# Altium PCB 1.PcbDoc
Units mm, origin at the board's own origin, x right, y up, seen from the top; angles counter-clockwise.
Board outline 152.4 x 101.6 mm, 2 copper layers (Top Layer, Bottom Layer); 10 components, 24 nets, 72 pads, 10 vias.
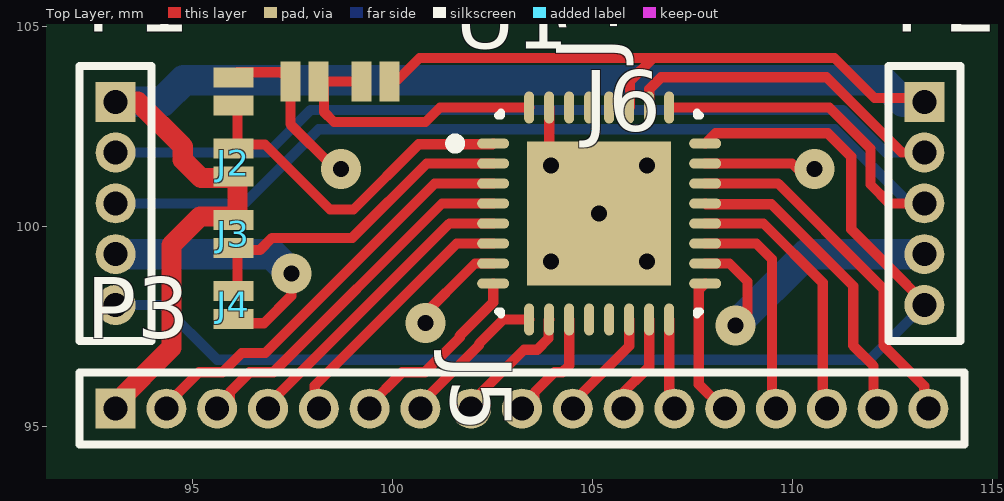
[diagram p0: Top Layer view]
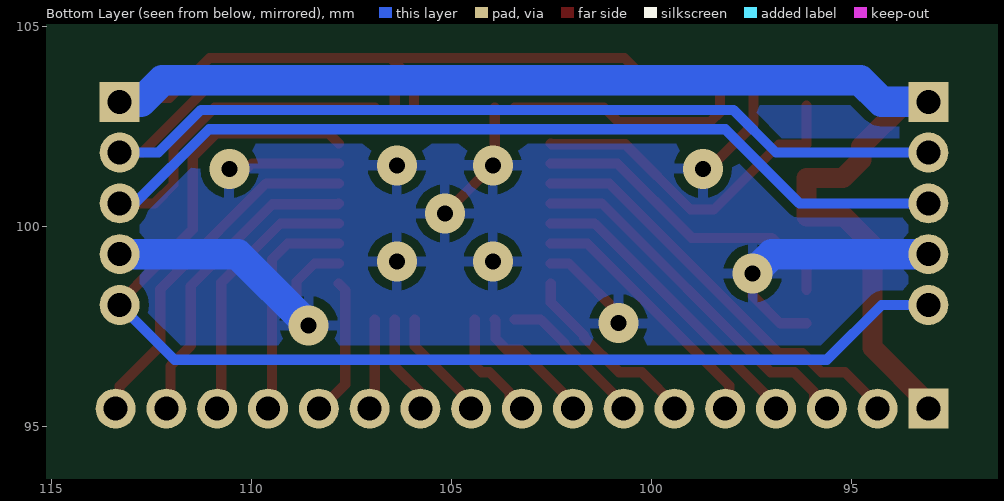
[diagram p1: Bottom Layer view, seen from below]

## Layer stack, top to bottom
Top Layer: signal copper 0.0356
Dielectric: dielectric 0.32, FR-4, Dk 4.8
Bottom Layer: signal copper 0.0356

## Board outline
25.4,25.4 177.8,25.4 177.8,127 25.4,127

## Design rules (kind name [scope] priority, off if disabled: settings)
Clearance [All] p1: gap=0.2
PolygonConnect [All] p1: connectstyle=Relief reliefconductorwidth=0.254 reliefentries=4 polygonreliefangle="90 Angle"
RoomDefinition Horn [InComponentClass('Horn')] p1: confinementstyle=ConfineIn formatcopy=TRUE lockcomponents=FALSE outline 83.261,76.073 137.617,76.073 137.617,119.761 83.261,119.761
RoutingVias [All] p1: holewidth=0.4 width=1 viastyle="Through Hole" minholewidth=0.4 minwidth=1 maxholewidth=0.711 maxwidth=1.27
SilkscreenOverComponentPads [All] p1: minsilkscreentomaskgap=0.254
SolderMaskExpansion [All] p1: expansion=0.102
Width [All] p1: maxlimit=0.762 minlimit=0.254 preferedwidth=0.254
27 further rules are at their usual default settings.

## Components (designator, comment, footprint, x,y, rotation, side; value= is the part's Value field where it differs from the comment)
J1 "Jamper" Jumper 99.568,103.632 r270 top
J2 "Jamper" Jumper 96.012,101.6 r180 top
J3 "Jamper" Jumper 96.012,99.822 r0 top
J4 "Jamper" Jumper 96.012,98.044 r180 top
J5 "Jamper" Jumper 96.012,103.378 r0 top
J6 "Jamper" Jumper 97.79,103.632 r90 top
P1 "MHDR1X5" MHDR1X5 93.066,103.124 r270 top
P2 "MHDR1X5" MHDR1X5 113.284,103.124 r270 top
P3 "MHDR1X17" MHDR1X17 93.066,95.453 r0 top
U1 "TLC59116" QFN50P500X500X100-32N 105.156,100.33 r0 top

## Footprints (in the part's own frame and the unit in brackets; to place one, negate y for a bottom-side part, rotate by r counter-clockwise, add the part's x,y. Pads: shape width x height; smd on the part's side, far side on the other; paste and mask are expansions set on the pad)
Jumper [mm]
  rect 1x0.5 smd: 1(0,-0.35) 2(0,0.35)
MHDR1X5 [mm] "Connector; Header; 5 Position"
  rect 1x1 hole 0.6: 1(0,0)
  round 1 hole 0.6: 2(1.27,0) 3(2.54,0) 4(3.81,0) 5(5.08,0)
  silkscreen extent -0.9,-0.9 5.98,0.9
MHDR1X17 [mm] "Connector; Header; 17 Position"
  rect 1x1 hole 0.6: 1(0,0)
  round 1 hole 0.6: 2(1.27,0) 3(2.54,0) 4(3.81,0) 5(5.08,0) 6(6.35,0) 7(7.62,0) 8(8.89,0) 9(10.16,0) 10(11.43,0) 11(12.7,0) 12(13.97,0) 13(15.24,0) 14(16.51,0) 15(17.78,0) 16(19.05,0) 17(20.32,0)
  silkscreen extent -0.9,-0.9 21.22,0.9
QFN50P500X500X100-32N [mm] "QFN, 32-Leads, Body 4,8x4,8mm (max), Pitch 0,50mm, IPC Medium Density"
  oval 0.8x0.25 smd: 1(-2.65,1.75) 2(-2.65,1.25) 3(-2.65,0.75) 4(-2.65,0.25) 5(-2.65,-0.25) 6(-2.65,-0.75) 7(-2.65,-1.25) 8(-2.65,-1.75) 17(2.65,-1.75) 18(2.65,-1.25) 19(2.65,-0.75) 20(2.65,-0.25) 21(2.65,0.25) 22(2.65,0.75) 23(2.65,1.25) 24(2.65,1.75)
  oval 0.25x0.8 smd: 9(-1.75,-2.65) 10(-1.25,-2.65) 11(-0.75,-2.65) 12(-0.25,-2.65) 13(0.25,-2.65) 14(0.75,-2.65) 15(1.25,-2.65) 16(1.75,-2.65) 25(1.75,2.65) 26(1.25,2.65) 27(0.75,2.65) 28(0.25,2.65) 29(-0.25,2.65) 30(-0.75,2.65) 31(-1.25,2.65) 32(-1.75,2.65)
  rect 3.6x3.6 smd: 33(0,0)
  silkscreen extent -3.72,-2.53 2.53,2.52, body extent -2.42,-2.43 2.43,2.42, height 1

## Part data
P1 P2: "Header, 5-Pin"
P3: "Header, 17-Pin"
U1: library part TLC59116FIRHBR

## Via types
v1: diameter 1, hole 0.4, Top Layer to Bottom Layer, tented top, 5 vias
v2: diameter 1, hole 0.4, Top Layer to Bottom Layer, 5 vias

## Nets (pads, with @x,y where several pads share a name; then routed paths per layer and width w, separated by ;. In a path a pad name is that pad's centre, name@x,y a point inside that pad or via, vN(x,y) a via of type N, cw(c..) or ccw(c..) an arc to the next point about the centre after c; other vN are vias at no path point)
GND: J4.2 J5.2 J6.2 P1.4 P2.4 U1.7 U1.18 U1.23 U1.31 U1.33 | length 27.4
  Top Layer w0.254: J4.2@96.114,97.587 96.774,97.587 97.46,98.273 v2(97.46,98.831) ; J5.2@96.114,103.861 97.206,103.861 97.434,103.632 97.434,102.565 98.476,101.524 v2@98.501,101.524 ; v2(100.813,97.587) 100.711,97.587 100.635,97.663 102.051,99.08 U1.7 ; U1.31 103.906,101.58 v1(103.956,101.53) v1(105.156,100.33) ; U1.18 108.413,99.08 108.864,98.628 108.864,97.841 v2(108.56,97.536) ; U1.23 109.977,101.58 110.414,101.143 v2@110.414,101.27
  Bottom Layer w0.762: P1.4 96.977,99.314 v2(97.46,98.831) ; v2(108.56,97.536) 110.338,99.314 P2.4
  other v1: 103.956,99.13 106.356,99.13 106.356,101.53
  other v2: 98.704,101.448 110.541,101.448
NetJ1_1: J1.1 J6.1 U1.32 | length 7.1
  Top Layer w0.254: J1.1@99.238,103.632 98.273,103.632 98.273,102.87 98.527,102.616 100.813,102.616 101.177,102.98 U1.32
NetJ2_1: J2.1 J5.1 U1.1 | length 8.7
  Top Layer w0.254: J2.1@96.114,102.057 96.799,102.057 98.425,100.432 99.013,100.432 100.644,102.063 102.489,102.063 U1.1 ; J2.1@96.114,102.08 J5.1@96.114,103.022
NetJ3_1: J3.1 J4.1 U1.2 | length 8.3
  Top Layer w0.254: J4.1@96.114,98.425 96.114,99.416 96.672,99.416 96.977,99.72 98.984,99.72 100.843,101.58 U1.2
NetP3_2: P3.2 U1.3 | length 10.6
  Top Layer w0.254: P3.2@94.234,95.504 94.294,95.504 95.15,96.36 95.737,96.36 96.22,96.842 96.807,96.842 101.045,101.08 U1.3
NetP3_3: P3.3 U1.4 | length 9.3
  Top Layer w0.254: P3.3@95.504,95.504 95.918,95.504 95.918,95.858 96.42,96.36 97.007,96.36 101.227,100.58 U1.4
NetP3_4: P3.4 U1.5 | length 7.6
  Top Layer w0.254: P3.4@96.774,95.504 96.834,95.504 101.41,100.08 U1.5
NetP3_5: P3.5 U1.6 | length 6.5
  Top Layer w0.254: P3.5@98.044,95.504 98.044,96.028 101.596,99.58 U1.6
NetP3_6: P3.6 U1.8 | length 4.8
  Top Layer w0.254: P3.6@99.314,95.504 99.374,95.504 100.23,96.36 100.795,96.36 101.668,97.232 101.668,97.271 102.506,98.108 U1.8
NetP3_7: P3.7 U1.9 | length 3.7
  Top Layer w0.254: P3.7@100.584,95.504 100.622,95.504 102.151,97.033 102.151,97.071 102.76,97.68 U1.9
NetP3_8: P3.8 U1.10 | length 3.2
  Top Layer w0.254: P3.8@101.854,95.504 103.274,96.924 103.605,96.924 103.889,97.208 103.889,97.663 U1.10
NetP3_9: P3.9 U1.11 | length 3
  Top Layer w0.254: P3.9@103.124,95.504 103.378,95.504 103.538,95.664 103.538,95.858 104.04,96.36 104.234,96.36 104.406,96.532 U1.11
NetP3_10: P3.10 U1.14 | length 2.8
  Top Layer w0.254: P3.10@104.394,95.504 105.906,97.016 U1.14
NetP3_11: P3.11 U1.15 | length 2.5
  Top Layer w0.254: P3.11@105.664,95.504 105.664,95.758 106.406,96.5 U1.15
NetP3_12: P3.12 U1.16 | length 2.2
  Top Layer w0.254: U1.16 106.906,95.532 P3.12@106.934,95.504
NetP3_13: P3.13 U1.17 | length 3.4
  Top Layer w0.254: U1.17 107.645,98.419 107.645,96.063 P3.13@108.204,95.504
NetP3_14: P3.14 U1.19 | length 5.5
  Top Layer w0.254: U1.19 109.081,99.58 109.474,99.187 P3.14@109.474,95.504
NetP3_15: P3.15 U1.20 | length 6.6
  Top Layer w0.254: U1.20 109.263,100.08 110.744,98.599 P3.15@110.744,95.504
NetP3_16: P3.16 U1.21 | length 7.8
  Top Layer w0.254: U1.21 107.823,100.563 109.463,100.563 111.463,98.563 111.463,98.56 111.506,98.517 111.506,97.028 112.014,96.52 P3.16@112.014,95.504
NetP3_17: P3.17 U1.22 | length 8.9
  Top Layer w0.254: U1.22 109.628,101.08 111.946,98.763 111.946,98.76 112.268,98.437 112.268,97.028 113.284,96.012 P3.17@113.284,95.504
RESET: P1.5 P2.5 U1.24 | length 29.8
  Top Layer w0.254: U1.24 108.063,102.337 110.871,102.337 111.455,101.752 111.455,99.936 112.428,98.963 112.428,98.96 113.284,98.104 P2.5
  Bottom Layer w0.254: P1.5 94.234,98.044 95.606,96.672 111.912,96.672 P2.5
SCL: P1.3 P2.3 U1.25 | length 29.7
  Top Layer w0.254: U1.25 110.91,102.98 111.938,101.952 111.938,101.054 112.408,100.584 P2.3
  Bottom Layer w0.254: P1.3 96.291,100.584 98.146,102.438 111.049,102.438 112.903,100.584 P2.3
SDA: P1.2 P2.2 U1.26 | length 29.3
  Top Layer w0.254: U1.26 106.406,103.435 106.707,103.736 110.837,103.736 112.719,101.854 P2.2
  Bottom Layer w0.254: P1.2 96.876,101.854 97.942,102.921 111.252,102.921 112.319,101.854 P2.2
VCC: J1.2 J2.2 J3.2 P1.1 P2.1 P3.1 U1.27 | length 47.6
  Top Layer w0.254: J1.2@100.076,103.632 100.663,104.219 106.455,104.219 ; U1.27 105.923,102.997 105.923,103.635 106.507,104.218 111.037,104.218 112.037,103.218 113.19,103.218 P2.1
  Top Layer w0.508: P3.1 93.066,95.58 94.463,96.977 94.463,99.543 95.174,100.254 96.114,100.254 96.114,101.219 95.199,101.219 94.742,101.676 94.742,102.006 93.624,103.124 P1.1
  Bottom Layer w0.762: P1.1 94.234,103.124 94.767,103.657 112.217,103.657 112.751,103.124 P2.1
pads on no net: U1.12 U1.13 U1.28 U1.29 U1.30

## Polygon pours and split planes (outlines as drawn)
GND on Bottom Layer "Bottom Layer-No Net" (solid, pour order 2): 92.202,104.14 114.046,104.14 114.046,96.774 92.202,96.774